# Altium PCB Sitara_Project_Rev_A.PcbDoc (part 4 of 5)
Units mm, origin at the board's own origin, x right, y up, seen from the top; angles counter-clockwise.
Board outline 120 x 85 mm, 8 copper layers (L1 (Sig), L2 (GND), L3 (PWR), L4 (Sig), L5 (GND), L6 (Sig), L7 (GND), L8 (Sig)), stack 1.188 mm thick; 515 components, 404 nets, 2043 pads, 82 vias.
Unrouted connection lines stored in the file: 1274.
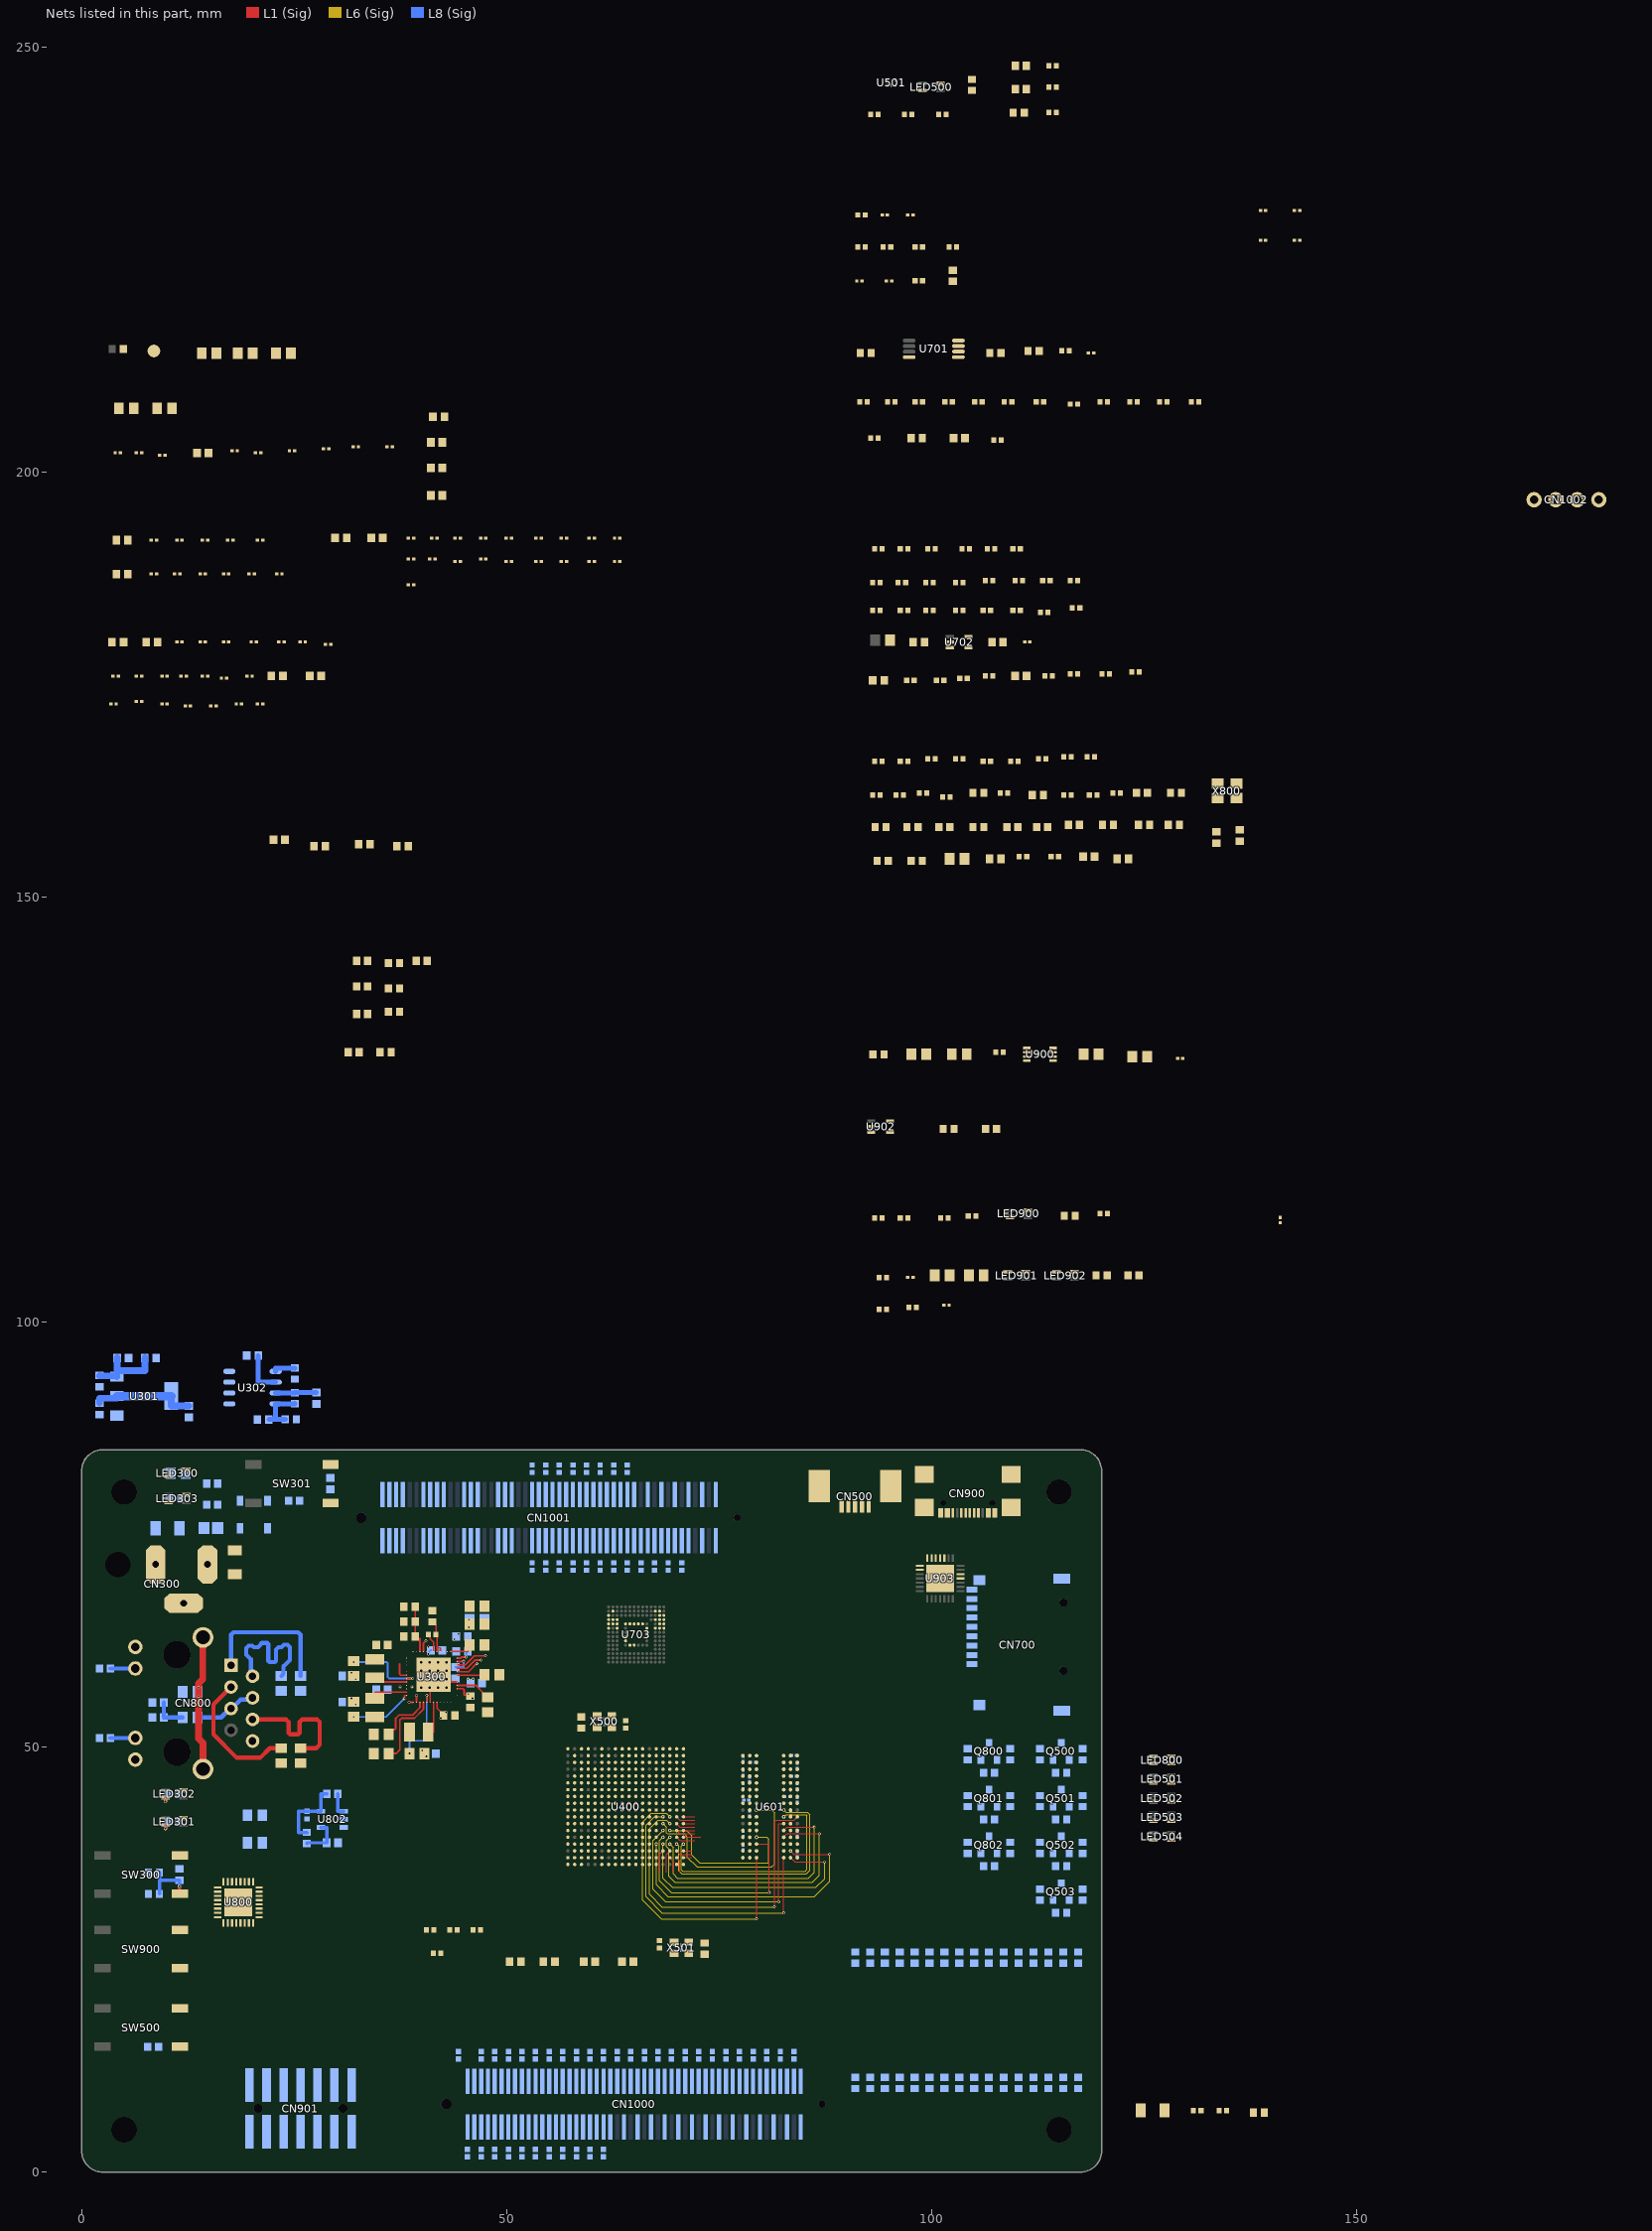
[diagram p5: the nets of this part, all layers, seen from the top]

## Part data
C300: library part CAP_22uF/25V/2012, "Ceramic CAP_22uF/25V/2012", JLCPCB Part Type="Basic Part", LCSC Part #=C45783
C301 C302 C303 C307 C308 C311 C315: library part CAP_100nF/50V/1608, "Ceramic CAP_100nF/50V/1608", JLCPCB Part Type="Basic Part", LCSC Part #=C14663
C304 C313 C316 C317 C318 C319 C320 C321 C322 C323 C324 C325 C328 C329 C414 C420 C427 C428 C448 C449 C464 C465 C701 C800: library part CAP_10uF/25V/1608, "Ceramic CAP_10uF/25V/1608", JLCPCB Part Type="Basic Part", LCSC Part #=C96446
C305 C309 C704 C710: library part CAP_10uF/10V/1608, "Ceramic CAP_10uF/10V/1608", JLCPCB Part Type="Basic Part", LCSC Part #=C19702
C306 C310 C326 C327 C709: library part CAP_2.2uF/16V/1608, "Ceramic CAP_2.2uF/16V/1608", JLCPCB Part Type="Basic Part", LCSC Part #=C23630
C312 C804: library part CAP_470pF/50V/1608, "Ceramic CAP_470pF/50V/1608", JLCPCB Part Type="Basic Part", LCSC Part #=C1620
C314 C400 C401 C405 C412 C413 C803: library part CAP_1uF/50V/1608, "Ceramic CAP_1uF/50V/1608", JLCPCB Part Type="Basic Part", LCSC Part #=C15849
C402 C403 C404 C406 C407 C408 C409 C410 C411 C415 C416 C417 C418 C419 C421 C422 C423 C424 C425 C426 C429 C430 C431 C432 C433 C434 C435 C436 C437 C438 C439 C440 C441 C442 C443 C444 C445 C446 C447 C450 C451 C452 C453 C454 C455 C456 C457 C458 C459 C460 C461 C462 C463 C466 C467 C468 C469 C470 C471 C472 C502 C506 C700 C703 C900 C903 C906 C907: library part CAP_100nF/25V/0603, "Ceramic CAP_100nF/25V/0603", JLCPCB Part Type="Extended Part", LCSC Part #=C181047
C500 C503 C504: library part CAP_100nF/50V/1005, "Ceramic CAP_100nF/50V/1005", JLCPCB Part Type="Basic Part", LCSC Part #=C307331
C501 C902 C904: library part CAP_4.7uF/10V/1005, "10V 4.7uF X5R ±20% 0402  Multilayer Ceramic Capacitors MLCC - SMD/SMT ROHS", JLCPCB Part Type="Basic Part", LCSC Part #=C23733
C505 C602: library part CAP_1nF/50V/1005, "Ceramic CAP_1nF/50V/1005", JLCPCB Part Type="Basic Part", LCSC Part #=C1523
C600 C601 C603 C604 C605 C606 C607 C608 C609 C610 C611 C612 C613 C614 C615 C616 C617 C618 C619 C620 C621 C622 C623 C624 C625 C626: library part CAP_47nF/16V/0603, "16V 47nF X5R ±10% 0201 Multilayer Ceramic Capacitors MLCC - SMD/SMT ROHS", JLCPCB Part Type="Extended Part", LCSC Part #=C88917
C702 C705 C706 C707 C708 C711 C712 C713 C714 C801 C802 C808 C901: library part CAP_100nF/16V/1005, "Ceramic CAP_100nF/16V/1005", JLCPCB Part Type="Basic Part", LCSC Part #=C1525
C805 C806: library part CAP_18pF/50V/1608, "Ceramic CAP_18pF/50V/1608", JLCPCB Part Type="Basic Part", LCSC Part #=C1647
C807: library part CAP_4.7uF/16V/1608, "Ceramic CAP_4.7uF/16V/1608", JLCPCB Part Type="Basic Part", LCSC Part #=C19666
C809 C810 C811 C812: library part CAP_10pF/50V/1608, "Ceramic CAP_10pF/50V/1608", JLCPCB Part Type="Basic Part", LCSC Part #=C1634
C813 C814: library part CAP_10nF/50V/1608, "Ceramic CAP_10nF/50V/1608", JLCPCB Part Type="Basic Part", LCSC Part #=C57112
C905: library part CAP_1uF/25V/1005, "Ceramic CAP_1uF/25V/1005", JLCPCB Part Type="Basic Part", LCSC Part #=C52923
CN300: library part CON_DC-Jack, ComponentLink1Description="Manufacturer Link", ComponentLink1URL=http://www.cliffuk.co.uk/
CN500: library part CON_USB2.0-Mini-B, "USB - mini B USB 2.0 Receptacle Connector 5 Position Surface Mount, Right Angle", JLCPCB Part Type="Extended Part", LCSC Part #=C2692070
CN700: library part CON_MICRO-SD_Socket_TF-01A, "Card Slot MicroSD card (TF card) Self-bouncing SMD SD Card / Memory Card Connector ROHS", JLCPCB Part Type="Extended Part", LCSC Part #=C91145
CN800: library part CON_RJ45_HR911105A, "RJ45Receptacle 1 WithLED Plugin Ethernet Connectors / Modular Connectors (RJ45 RJ11) ROHS", JLCPCB Part Type="Extended Part", LCSC Part #=C12074
CN900: library part CON_USB-Type-C, "USB 2.0 5A 1 Surface Mount 16 Female -35℃~+75℃ Type-C SMD  USB Connectors ROHS", JLCPCB Part Type="Extended Part", LCSC Part #=C2977718
CN901: library part CON_NC_BOX_HEADER_DUAL_2x7PIN(2.00MM)_1, "CONN HEADER SMD 14POS 2MM"
CN1000 CN1001: library part CON_BergStak-Lite(0.8mm)_MALE-100P(10144517-101802LF), JLCPCB Part Type="Extended Part"
CN1002: library part CON_PIN_HEADER_SINGLE-4PIN(2.54MM), "CON_PIN_HEADER_SINGLE-4PIN(2.54MM)"
D300 D301: library part DIO_B5819W, "40V 600mV@1A 1A SOD-123  Schottky Barrier Diodes (SBD) ROHS", JLCPCB Part Type="Basic Part", LCSC Part #=C8598
FB400 FB401 FB402 FB800: library part FB_BLM21PG121SN1D, "3A 1 30mΩ 120Ω@100MHz ±25% 0805  Ferrite Beads ROHS", JLCPCB Part Type="Extended Part", LCSC Part #=C79382
H1000 H1001 H1002 H1003: library part HOLE_NTH-3MM, "Non-Through Hole 3mm"
L300 L301 L302: library part IND_LQM2HPN2R2MG0L, "2.2 µH Shielded Multilayer Inductor 1.3 A 100mOhm Max 1008 (2520 Metric)", JLCPCB Part Type="Extended Part", LCSC Part #=C86092
LED300 LED301 LED302 LED303 LED500 LED900: library part LED_MHT170RGBCT(GREEN), "Colorless transparence -30℃~+85℃ Positive post Common anode RGB 120° 0805  Light Emitting Diodes (LED) ROHS", JLCPCB Part Type="Extended Part", LCSC Part #=C2962094
LED501 LED502 LED503 LED504 LED901 LED902: library part LED_MHT170RGBCT(BLUE), "Colorless transparence -30℃~+85℃ Positive post Common anode RGB 120° 0805  Light Emitting Diodes (LED) ROHS", JLCPCB Part Type="Extended Part", LCSC Part #=C2962094
LED800: library part LED_RGB_MHT170RGBCT, "Colorless transparence -30℃~+85℃ Positive post Common anode RGB 120° 0805  Light Emitting Diodes (LED) ROHS", JLCPCB Part Type="Extended Part", LCSC Part #=C2962094
Q500 Q501 Q502 Q503 Q800 Q801 Q802: library part FET_2N7002, "60V 115mA 200mW 7.5Ω@10V,500mA N Channel SOT-23  MOSFETs ROHS", JLCPCB Part Type="Basic Part", LCSC Part #=C8545
R300 R309 R500: library part RES_0R/3216/0.25W, "RES_0R/3216/0.25W", JLCPCB Part Type="Basic Part", LCSC Part #=C17888, Power Rating=0.1W, Precision=1%, Size=1608
R301 R304 R305 R503 R512 R513 R514 R515 R523 R525 R526 R527 R528 R529 R530 R531 R532 R537 R538: library part RES_100K/1608/0.1W, "RES_100K/1608/0.1W", JLCPCB Part Type="Basic Part", LCSC Part #=C25803, Power Rating=0.1W, Precision=1%, Size=1608
R302 R303: library part RES_NC_10K/1608/0.1W, "RES_10K/1608/0.1W", Power Rating=0.1W, Precision=1%, Size=1608
R306: library part RES_680R/2012/0.125W, "RES_680R/2012/0.125W", JLCPCB Part Type="Basic Part", LCSC Part #=C17798, Power Rating=0.125W, Precision=1%, Size=2012
R307 R327 R328: library part RES_4.7K/1608/0.1W, "RES_4.7K/1608/0.1W", JLCPCB Part Type="Basic Part", LCSC Part #=C23162, Power Rating=0.1W, Precision=1%, Size=1608
R308 R540 R551 R723 R817 R818 R1000 R1001 R1002 R1003 R1004 R1005 R1006 R1007 R1008 R1009 R1010 R1011 R1012 R1013 R1014 R1015 R1016 R1017 R1018 R1019 R1020 R1021 R1022 R1023 R1024 R1025 R1026 R1027 R1028 R1029 R1030 R1031 R1032 R1033 R1034 R1035 R1036 R1037 R1038 R1039 R1040 R1041 R1042 R1043 R1044 R1045 R1046 R1047 R1048 R1049 R1050 R1051 R1052 R1053 R1054 R1055: library part RES_0R/1005/62.5mW, "RES_0R/1005/62.5mW", JLCPCB Part Type="Basic Part", LCSC Part #=C17168, Power Rating=62.5mW, Precision=1%, Size=1005
R310 R311 R312 R313 R314 R315 R316 R317 R319 R336 R400 R401 R741 R834 R840 R841 R842 R843 R844 R900 R903 R914 R915: library part RES_0R/2012/0.125W, "RES_0R/2012/0.125W", JLCPCB Part Type="Basic Part", LCSC Part #=C17477, Power Rating=0.125W, Precision=1%, Size=2012
R318 R331 R334: library part RES_510R/1608/0.1W, "RES_510R/1608/0.1W", JLCPCB Part Type="Basic Part", LCSC Part #=C23193, Power Rating=0.1W, Precision=1%, Size=1608
R320 R321: library part RES_1.5K/2012/0.125W, "RES_1.5K/2012/0.125W", JLCPCB Part Type="Basic Part", LCSC Part #=C4310, Power Rating=0.125W, Precision=1%, Size=2012
R322 R323 R324 R325 R329 R330 R332 R335 R522 R542 R543 R545 R553 R711 R717 R722 R820 R821 R911 R916: library part RES_0R/1608/0.1W, "RES_0R/1608/0.1W", JLCPCB Part Type="Basic Part", LCSC Part #=C21189, Power Rating=0.1W, Precision=1%, Size=1608
R326: library part RES_200K/1608/0.1W, "RES_200K/1608/0.1W", JLCPCB Part Type="Basic Part", LCSC Part #=C25811, Power Rating=0.1W, Precision=1%, Size=1608
R333: library part RES_330K/1608/0.1W, "RES_330K/1608/0.1W", JLCPCB Part Type="Basic Part", LCSC Part #=C23137, Power Rating=0.1W, Precision=1%, Size=1608
R337 R901 R902: library part RES_NC_0R/2012/0.125W, "0R/2012/0.125W/NC", Power Rating=0.1W, Precision=1%, Size=1608
R402 R813 R815: library part RES_NC_0R/1608/0.1W, "0R/1608/0.1W/NC", Power Rating=0.1W, Precision=1%, Size=1608
R501 R907: library part RES_1M/1005/62.5mW, "RES_1M/1005/62.5mW", JLCPCB Part Type="Basic Part", LCSC Part #=C26083, Power Rating=62.5mW, Precision=1%, Size=1005
R502 R504 R505 R506 R507 R508 R509 R510 R511 R516 R517 R524 R533 R534 R535 R536: library part RES_NC_100K/1608/0.1W, "RES_100K/1608/0.1W", Power Rating=0.1W, Precision=1%, Size=1608
R518 R823: library part RES_100R/1608/0.1W, "RES_100R/1608/0.1W", JLCPCB Part Type="Basic Part", LCSC Part #=C22775, Power Rating=0.1W, Precision=1%, Size=1608
R519 R520 R702 R910: library part RES_4.7K/1005/62.5mW, "RES_4.7K/1005/62.5mW", JLCPCB Part Type="Basic Part", LCSC Part #=C25900, Power Rating=62.5mW, Precision=1%, Size=1005
R521 R908: library part RES_1K/1608/0.1W, "RES_1K/1608/0.1W", JLCPCB Part Type="Basic Part", LCSC Part #=C21190, Power Rating=0.1W, Precision=1%, Size=1608
R539 R819 R824 R829 R830 R831 R832 R833 R835 R909: library part RES_10K/1608/0.1W, "RES_10K/1608/0.1W", JLCPCB Part Type="Basic Part", LCSC Part #=C25804, Power Rating=0.1W, Precision=1%, Size=1608
R541 R547 R550 R555 R845 R846 R847 R850 R853: library part RES_470R/1608/0.1W, "RES_470R/1608/0.1W", JLCPCB Part Type="Basic Part", LCSC Part #=C23179, Power Rating=0.1W, Precision=1%, Size=1608
R544 R548 R552 R556 R822 R848 R851 R854: library part RES_12K/1608/0.1W, "RES_12K/1608/0.1W", JLCPCB Part Type="Basic Part", LCSC Part #=C22790, Power Rating=0.1W, Precision=1%, Size=1608
R546 R549 R554 R557 R849 R852 R855: library part RES_22R/1608/0.1W, "RES_22R/1608/0.1W", JLCPCB Part Type="Basic Part", LCSC Part #=C23345, Power Rating=0.1W, Precision=1%, Size=1608
R600: library part RES_1.5K/1005/62.5mW, "RES_1.5K/1005/62.5mW", JLCPCB Part Type="Basic Part", LCSC Part #=C25867, Power Rating=62.5mW, Precision=1%, Size=1005
R601 R602 R603 R703 R704 R705 R706 R707 R708 R709 R719 R720 R721 R724 R725 R726 R727 R728 R729 R730 R731: library part RES_10K/1005/62.5mW, "RES_10K/1005/62.5mW", JLCPCB Part Type="Basic Part", LCSC Part #=C25744, Power Rating=62.5mW, Precision=1%, Size=1005
R604: library part RES_240R/1608/0.1W, "RES_240R/1608/0.1W", JLCPCB Part Type="Basic Part", LCSC Part #=C23350, Power Rating=0.1W, Precision=1%, Size=1608
R605 R836 R837 R838 R839: library part RES_49.9R/1005/62.5mW, "RES_49.9R/1005/62.5mW", JLCPCB Part Type="Basic Part", LCSC Part #=C25120, Power Rating=62.5mW, Precision=1%, Size=1005
R700 R701: library part RES_NC_4.7K/1608/0.1W, "RES_4.7K/1608/0.1W", Power Rating=0.1W, Precision=1%, Size=1608
R710 R712 R713 R714 R715 R716 R718 R732 R733 R734 R735 R736 R737 R738 R739 R740 R801 R802 R803 R804 R805: library part RES_22R/1005/62.5mW, "RES_22R/1005/62.5mW", JLCPCB Part Type="Basic Part", LCSC Part #=C25092, Power Rating=62.5mW, Precision=1%, Size=1005
R800 R806 R807 R808 R809 R810 R811 R812 R814 R816: library part RES_100R/1005/62.5mW, "RES_100R/1005/62.5mW", JLCPCB Part Type="Basic Part", LCSC Part #=C25076, Power Rating=62.5mW, Precision=1%, Size=1005
R825 R826 R827 R828: library part RES_1.5K/1608/0.1W, "RES_1.5K/1608/0.1W", JLCPCB Part Type="Basic Part", LCSC Part #=C22843, Power Rating=0.1W, Precision=1%, Size=1608
R904: library part RES_100K/1005/62.5mW, "RES_100K/1005/62.5mW", JLCPCB Part Type="Basic Part", LCSC Part #=C25741, Power Rating=62.5mW, Precision=1%, Size=1005
R905 R906: library part RES_5.1K/1005/62.5mW, "RES_5.1K/1005/62.5mW", JLCPCB Part Type="Basic Part", LCSC Part #=C25905, Power Rating=62.5mW, Precision=1%, Size=1005
R912 R913: library part RES_680R/1608/0.1W, "RES_680R/1608/0.1W", JLCPCB Part Type="Basic Part", LCSC Part #=C23228, Power Rating=0.1W, Precision=1%, Size=1608
SW300 SW301 SW500 SW900: library part SW_K2-1102SP-C4SC-04(2P), "-25℃~+85℃ 6mm 5mm Round Button 50mA Brick nogging 6mm SPST 100MΩ 100000 250gf@±30gf 12V SMD  Tactile Switches ROHS", JLCPCB Part Type="Extended Part", LCSC Part #=C127509
U300: library part IC_PMIC_TPS65217CRSLR, "Battery Management, Display (LED Drivers), Handheld/Mobile Devices, Power Supply PMIC 48-VQFN (6x6)", JLCPCB Part Type="Extended Part", LCSC Part #=C116081
U301: library part IC_REG_AMS1117-3.3, "72dB@(120Hz) 1A 1.3V@(800mA) Fixed 3.3V~3.3V Positive 1 SOT-223  Linear Voltage Regulators (LDO) ROHS", JLCPCB Part Type="Basic Part", LCSC Part #=C6186
U302: library part IC_REG_MIC5209YM-TR, "Linear Voltage Regulator IC Positive Adjustable 1 Output 500mA 8-SOIC", JLCPCB Part Type="Extended Part", LCSC Part #=C461593
U400: library part IC_SOC_AM3358BZCZ100, "ARM® Cortex®-A8 Microprocessor IC Sitara™ 1 Core, 32-Bit 1.0GHz 324-NFBGA (15x15)", JLCPCB Part Type="Extended Part", LCSC Part #=C73932
U501: library part DIO_TVS_TPD4S012DRYR, "Clamp 3A (8/20µs) Ipp Tvs Diode Surface Mount 6-SON (1.45x1)", JLCPCB Part Type="Extended Part", LCSC Part #=C96506
U601: library part IC_MEM_DDR3L_D2516ECMDXGJD-U, "DRAM 4Gb 96 ball FBGA DDR3L 1866", JLCPCB Part Type="Extended Part", LCSC Part #=C2927180
U701: library part IC_EEPROM_AT24C16, "IC EEPROM 16KBIT I2C 1MHZ 8TSSOP", JLCPCB Part Type="Extended Part", LCSC Part #=C112954
U702: library part IC_BUF_SN74LVC1G06DCKR, "Inverter IC 1 Channel Open Drain SC-70-5", JLCPCB Part Type="Extended Part", LCSC Part #=C7828
U703: library part IC_eMMC_MTFC32GAZAQHD-WT, "FLASH - NAND Memory IC 256Gbit MMC 200 MHz 153-VFBGA (11.5x13)", JLCPCB Part Type="Extended Part", LCSC Part #=C5330430
U800: library part IC_ETH_LAN8710A-EZC-TR, "4/4 Transceiver Full MII, RMII 32-QFN (5x5)", JLCPCB Part Type="Extended Part", LCSC Part #=C46185
U802: library part IC_AND_SN74AHC1G09DBVR, "AND Gate IC 1 Channel Open Drain SOT-23-5", JLCPCB Part Type="Extended Part", LCSC Part #=C840099
U900: library part IC_BUF_SN74LVC2G241DCUR, "Buffer, Non-Inverting 2 Element 1 Bit per Element 3-State Output 8-VSSOP", JLCPCB Part Type="Extended Part", LCSC Part #=C10430
U902: library part IC_BUF_SN74LVC1G07DCKR, "Buffer, Non-Inverting 1 Element 1 Bit per Element Open Drain Output SC-70-5", JLCPCB Part Type="Extended Part", LCSC Part #=C7830
U903: library part IC_USB_CP2102, "Transceiver 1Mbps USB 1/1 QFN-28_5x5x05P  USB ICs ROHS", JLCPCB Part Type="Basic Part", LCSC Part #=C6568
X500: library part OSC_SX2M24.000M20F30TNN(24MHz), "1.62V~3.63V ±20ppm 10mA ±30ppm CMOS 24MHz SMD2520-4P  Crystal Oscillators ROHS", JLCPCB Part Type="Extended Part", LCSC Part #=C2901600
X501: library part OSC_SX2M32.768KM20F30TNN(32.768kHz), "1.62V~3.63V ±20ppm 90uA ±30ppm CMOS 32.768kHz SMD2520-4P  Crystal Oscillators ROHS", JLCPCB Part Type="Extended Part", LCSC Part #=C2901603
X800: library part XTAL_25MHz_X322525MOB4SI, "25MHz Surface Mount Crystal 12pF ±10ppm ±20ppm SMD3225-4P Crystals ROHS", JLCPCB Part Type="Basic Part", LCSC Part #=C9006

## Via types
v1: diameter 0.35, hole 0.2, L1 (Sig) to L8 (Sig), tented both sides, 66 vias
v2: diameter 0.45/0.45/0.45/0.45/0.45/0.45/0.45/0.45 (per signal layer), hole 0.3, L1 (Sig) to L8 (Sig), tented both sides, 16 vias

## Nets (pads, with @x,y where several pads share a name; then routed paths per layer and width w, separated by ;. In a path a pad name is that pad's centre, name@x,y a point inside that pad or via, vN(x,y) a via of type N, cw(c..) or ccw(c..) an arc to the next point about the centre after c; other vN are vias at no path point)
AIN0: R1001.2 U400.B6
AIN1: R1003.2 U400.C7
AIN2: R1005.2 U400.B7
AIN3: R1007.2 U400.A7
AIN4: R1009.2 U400.C8
AIN5: R1011.2 U400.B8
AIN6: R1013.2 U400.A8
AM3_EEPROM_WP: R702.1 U400.T16 U701.7
AM3_GPIO0_22: R1027.1 U400.U10
AM3_GPIO0_23: R1030.1 U400.T10
AM3_GPIO0_26: R1033.1 U400.T11
AM3_GPIO0_27: R1036.1 U400.U12
AM3_GPIO1_12: R1039.1 U400.T12
AM3_GPIO1_13: R1042.1 U400.R12
AM3_GPIO1_14: R1045.1 U400.V13
AM3_GPIO1_15: R1048.1 U400.U13
AM3_GPIO_ETH_PHY_RESET: R835.2 U400.E18 U802.1 | length 2.7
  L8 (Sig) w0.4: R835.2@30.15,44.5 30.15,42.45 U802.1@30.85,42.45
AM3_I2C0_SCL: R322.2 R700.1 U400.C16 U701.6
AM3_I2C0_SDA: R323.2 R701.1 U400.C17 U701.5
AM3_I2C1_SCL: R1028.2 U400.A16
AM3_I2C1_SDA: R1031.2 U400.B16
AM3_I2C2_SCL: R1029.1 U400.D17
AM3_I2C2_SDA: R1032.1 U400.D18
AM3_PMIC_LDO_PGOOD: R329.2 U400.B5
AM3_PMIC_nINT: R330.2 U400.B18
AM3_PMIC_nWAKEUP: R332.2 U400.C5
AM3_PMIC_PGOOD: R325.2 U400.B15 U902.2
AM3_PMIC_PWR_EN: R324.2 U400.C6
AM3_SPI1_CS0: R1055.2 U400.C12
AM3_SPI1_D0: R1053.2 U400.B13
AM3_SPI1_D1: R1054.2 U400.D12
AM3_SPI1_SCLK: R1051.2 U400.A13
AM3_STATUS_LED_B: R855.1 R1041.1 U400.R5
AM3_STATUS_LED_G: R852.1 R1038.1 U400.U5
AM3_STATUS_LED_R: R849.1 R1035.1 U400.V5
AM3_UART0_RX: R901.2 R912.1 R914.2 U400.E15
AM3_UART0_TX: R902.1 R913.1 R915.2 U400.E16
AM3_UART1_RX: R1037.2 U400.D16
AM3_UART1_TX: R1034.2 U400.D15
AM3_UART2_RX: R1043.2 U400.A17
AM3_UART2_TX: R1040.2 U400.B17
AM3_UART4_RX: R1049.2 U400.T17
AM3_UART4_TX: R1046.2 U400.U17
AM3_USER_LED1: R546.1 R1044.1 U400.V15
AM3_USER_LED2: R549.1 R1047.1 U400.U15
AM3_USER_LED3: R554.1 R1050.1 U400.T15
AM3_USER_LED4: R557.1 R1052.1 U400.V16
AM3_WARM_nRESET: R911.2 U400.A10 U802.2 U902.4
CAP_VBB_MPU: C401.1 U400.C10
CAP_VDD_RTC: C400.1 U400.D6
CAP_VDD_SRAM_CORE: C413.1 U400.D9
CAP_VDD_SRAM_MPU: C412.1 U400.D11
CP2102_RST: R910.2 U903.9
CP2102_RXD: R915.1 U903.25
CP2102_RXD_LED: LED902.3 R913.2
CP2102_TXD: R914.1 U903.26
CP2102_TXD_LED: LED901.3 R912.2
DDR_A0: U400.F3 U601.N3 | length 18.8
  L6 (Sig) w0.1: v1(69.2,40.2) 71.2,40.2 71.8,39.6 71.8,37.3 72.7,36.4 80.741,36.4 80.8,36.459 80.8,39.2 80.6,39.4 v1(79.4,39.4)
DDR_A1: U400.H1 U601.P7 | length 1.3
  L1 (Sig) w0.1: U400.H1@70.8,41.8 72.1,41.8
DDR_A2: U400.E4 U601.P3 | length 25.9
  L1 (Sig) w0.1: U601.P3@79.4,38.6 80.8,38.6 80.9,38.5 v1(80.9,32.9)
  L6 (Sig) w0.1: v1(68.4,39.4) 68,39 68,34.3 69.4,32.9 v1(80.9,32.9)
DDR_A3: U400.C3 U601.N2 | length 2.7
  L1 (Sig) w0.1: 68.8,35.3 68.8,37.4 U400.C3@69.2,37.8
DDR_A4: U400.C2 U601.P8 | length 2
  L1 (Sig) w0.1: U400.C2@70,37.8 70.4,37.4 71.8,37.4
DDR_A5: U400.B1 U601.P2 | length 1
  L1 (Sig) w0.1: U400.B1@70.8,37 71.8,37
DDR_A6: U400.D5 U601.R8 | length 34.5
  L1 (Sig) w0.1: v1(83.4,37.8) 83.8,37.4 v1(88,37.4)
  L6 (Sig) w0.1: v1(67.6,38.6) 67.6,33.8 69,32.4 86.2,32.4 88,34.2 v1(88,37.4)
DDR_A7: U400.E2 U601.R2 | length 2.3
  L1 (Sig) w0.1: U400.E2@70,39.4 70.4,39 72.1,39
DDR_A8: U400.D4 U601.T8 | length 30.1
  L1 (Sig) w0.1: U601.T8@83.4,37 83.9,36.5 v1(87.4,36.5)
  L6 (Sig) w0.1: v1(68.4,38.6) 68.4,34.6 69.5,33.5 86.4,33.5 87.4,34.5 v1(87.4,36.5)
DDR_A9: U400.C1 U601.R3 | length 1
  L1 (Sig) w0.1: U400.C1@70.8,37.8 71.8,37.8
DDR_A10: U400.F4 U601.L7 | length 32.6
  L1 (Sig) w0.1: v1(82,31.8) 82,40.941 82.059,41 U601.L7@82.6,41
  L6 (Sig) w0.1: v1(68.4,40.2) 67.2,39 67.2,33.3 68.7,31.8 v1(82,31.8)
DDR_A11: U400.F2 U601.R7 | length 2.3
  L1 (Sig) w0.1: U400.F2@70,40.2 70.4,39.8 72.1,39.8
DDR_A12: U400.E3 U601.N7 | length 32.5
  L1 (Sig) w0.1: U601.N7@82.6,39.4 83,39.8 v1(86.8,39.8)
  L6 (Sig) w0.1: v1(69.2,39.4) 68.8,39 68.8,38.3 69.1,38 69.1,34.8 69.8,34.1 85.958,34.1 86.8,34.942 v1(86.8,39.8)
DDR_A13: U400.H3 U601.T3 | length 34.5
  L1 (Sig) w0.1: v1(79.4,29.8) U601.T3@79.4,37
  L6 (Sig) w0.1: v1(69.2,41.8) 68.8,42.2 67,42.2 66,41.2 66,32 68.2,29.8 v1(79.4,29.8)
DDR_A14: U400.H4 U601.T7 | length 34.3
  L1 (Sig) w0.1: v1(82.6,30.5) U601.T7@82.6,37
  L6 (Sig) w0.1: v1(68.4,41.8) 67.4,41.8 66.4,40.8 66.4,32.4 68.3,30.5 v1(82.6,30.5)
DDR_A15: U400.D3 U601.M7 | length 29.8
  L1 (Sig) w0.1: U601.M7@82.6,40.2 83,40.6 v1(86.2,40.6)
  L6 (Sig) w0.1: v1(69.2,38.6) 69.6,38.2 69.6,35.1 70.1,34.6 85.5,34.6 86.2,35.3 v1(86.2,40.6)
DDR_BA0: U400.C4 U601.M2 | length 2.7
  L1 (Sig) w0.1: 68,35.3 68,37.4 U400.C4@68.4,37.8
DDR_BA1: U400.E1 U601.N8 | length 2
  L1 (Sig) w0.1: U400.E1@70.8,39.4 72.8,39.4
DDR_BA2: U400.B3 U601.M3 | length 1.8
  L1 (Sig) w0.1: U400.B3@69.2,37 69.578,36.622 69.578,35.322
DDR_CK_N: U400.D1 U601.K7 | length 27.3
  L6 (Sig) w0.1: v1(70.8,38.6) 70.55,38.35 70.55,35.575 70.725,35.4 85.125,35.4 85.35,35.625 85.35,41.95 85.25,42.05 82.85,42.05 v1(82.6,41.8)
DDR_CK_P: U400.D2 U601.J7 | length 28.8
  L6 (Sig) w0.1: v1(70,38.6) 70.25,38.35 70.25,35.451 70.601,35.1 85.249,35.1 85.65,35.501 85.65,42.074 85.374,42.35 82.85,42.35 v1(82.6,42.6)
DDR_CKE: R601.1 U400.G3 U601.K9 | length 39
  L1 (Sig) w0.1: v1(81.5,31.2) 81.5,41.3 81.6,41.4 83.8,41.4 U601.K9@84.2,41.8
  L6 (Sig) w0.1: v1(69.2,41) 68.8,41.4 67.8,41.4 66.8,40.4 66.8,32.7 68.3,31.2 v1(81.5,31.2)
DDR_DQ0: U400.M3 U601.E3
DDR_DQ1: U400.M4 U601.F7
DDR_DQ2: U400.N1 U601.F2
DDR_DQ3: U400.N2 U601.F8
DDR_DQ4: U400.N3 U601.H3
DDR_DQ5: U400.N4 U601.H8
DDR_DQ6: U400.P3 U601.G2
DDR_DQ7: U400.P4 U601.H7
DDR_DQ8: U400.J1 U601.D7
DDR_DQ9: U400.K1 U601.C3
DDR_DQ10: U400.K2 U601.C8
DDR_DQ11: U400.K3 U601.C2
DDR_DQ12: U400.K4 U601.A7
DDR_DQ13: U400.L3 U601.A2
DDR_DQ14: U400.L4 U601.B8
DDR_DQ15: U400.M1 U601.A3
DDR_DQM0: U400.M2 U601.E7
DDR_DQM1: U400.J2 U601.D3
DDR_DQS0_N: U400.P2 U601.G3
DDR_DQS0_P: U400.P1 U601.F3
DDR_DQS1_N: U400.L2 U601.B7
DDR_DQS1_P: U400.L1 U601.C7
DDR_NCAS: U400.F1 U601.K3 | length 1.3
  L1 (Sig) w0.1: U400.F1@70.8,40.2 72.1,40.2
DDR_NCS: U400.H2 U601.L2 | length 2.3
  L1 (Sig) w0.1: U400.H2@70,41.8 70.4,41.4 72.1,41.4
DDR_NRAS: U400.G4 U601.J3 | length 25.5
  L6 (Sig) w0.1: v1(68.4,41) 68.8,40.6 68.8,39.9 68.9,39.8 70.9,39.8 71.271,39.429 71.271,37.029 72.4,35.9 81.2,35.9 81.5,36.2 81.5,42.3 81.2,42.6 v1(79.4,42.6)
DDR_NRST: R600.1 U400.G2 U601.T2 | length 2.3
  L1 (Sig) w0.1: U400.G2@70,41 70.4,40.6 72.1,40.6
DDR_NWE: U400.B2 U601.L3 | length 1.9
  L1 (Sig) w0.1: U400.B2@70,37 70.4,36.6 70.4,35.3
DDR_ODT: U400.G1 U601.K1 | length 1.3
  L1 (Sig) w0.1: U400.G1@70.8,41 72.1,41
DDR_VREF: C600.2 C601.2 C602.2 C625.2 C626.2 R602.2 R603.2 U400.J4 U601.H1 U601.M8
DDR_VTP: R605.1 U400.J3
DGND: C300.1 C301.1 C302.1 C303.1 C304.1 C305.1 C306.1 C307.1 C308.1 C309.1 C310.1 C311.1 C312.1 C316.1 C317.1 C318.1 C319.1 C320.1 C321.1 C322.1 C323.1 C324.1 C325.1 C326.1 C327.1 C328.1 C329.1 C400.2 C401.2 C402.1 C403.1 C404.1 C405.1 C406.1 C407.1 C408.1 C409.1 C410.1 C411.1 C412.2 C413.2 C414.1 C415.1 C416.1 C417.1 C418.1 C419.1 C420.1 C421.1 C422.1 C423.1 C424.1 C425.1 C426.1 C427.1 C428.1 C429.1 C430.1 C431.1 C432.1 C433.1 C434.1 C435.1 C436.1 C437.1 C438.1 C439.1 C440.1 C441.1 C442.1 C443.1 C444.1 C445.1 C446.1 C447.1 C448.1 C449.1 C450.1 C451.1 C452.1 C453.1 C454.1 C455.1 C456.1 C457.1 C458.1 C459.1 C460.1 C461.1 C462.1 C463.1 C464.1 C465.1 C466.1 C467.1 C468.1 C469.1 C470.1 C471.1 C472.1 C500.2 C501.1 C600.1 C601.1 C602.1 C603.1 C604.1 C605.1 C606.1 C607.1 C608.1 C609.1 C610.1 C611.1 C612.1 C613.1 C614.1 C615.1 C616.1 C617.1 C618.1 C619.1 C620.1 C621.1 C622.1 C623.1 C624.1 C625.1 C626.1 C700.2 C701.2 C702.1 C703.1 C704.1 C705.1 C706.1 C707.1 C708.1 C709.1 C710.1 C711.1 C712.1 C713.1 C714.1 C800.2 C801.2 C802.2 C803.2 C804.2 C805.1 C806.1 C807.1 C808.2 C809.1 C810.1 C811.1 C812.1 C813.2 C814.2 C900.1 C901.1 C902.1 C903.2 C904.1 C905.2 C906.1 C907.1 CN500.5 CN700.6 CN700.10 CN700.11 CN700.12 CN700.13 CN800.8 CN900.A1 CN900.B1 CN901.6 CN901.8 CN901.10 CN901.12 CN901.14 CN1000.3 CN1000.4 CN1000.7 CN1000.8 CN1000.11 CN1000.12 CN1000.15 CN1000.16 CN1000.19 CN1000.20 CN1000.23 CN1000.24 CN1000.27 CN1000.28 CN1000.31 CN1000.32 CN1000.35 CN1000.36 CN1000.39 CN1000.40 CN1000.43 CN1000.44 CN1000.47 CN1000.48 CN1000.51 CN1000.52 CN1000.55 CN1000.56 CN1000.59 CN1000.60 CN1000.63 CN1000.64 CN1000.67 CN1000.68 CN1000.71 CN1000.72 CN1000.75 CN1000.76 CN1000.79 CN1000.80 CN1000.83 CN1000.84 CN1000.87 CN1000.88 CN1000.91 CN1000.92 CN1000.95 CN1000.96 CN1000.99 CN1000.100 CN1001.13 CN1001.14 CN1001.15 CN1001.16 CN1001.17 CN1001.18 CN1001.19 CN1001.20 CN1001.47 CN1001.48 CN1001.51 CN1001.52 CN1001.55 CN1001.56 CN1001.59 CN1001.60 CN1001.63 CN1001.64 CN1001.67 CN1001.68 CN1001.71 CN1001.72 CN1001.75 CN1001.76 CN1001.79 CN1001.80 CN1001.83 CN1001.84 CN1001.87 CN1001.88 CN1001.91 CN1001.92 CN1001.95 CN1001.96 CN1001.99 CN1001.100 CN1002.4 FB400.1 LED303.2 Q500.2 Q501.2 Q502.2 Q503.2 Q800.2 Q801.2 Q802.2 R301.1 R305.1 R306.2 R307.2 R309.2 R318.1 R331.1 R333.1 R400.2 R401.1 R501.1 R520.1 R521.2 R522.1 R523.1 R524.1 R525.1 R526.1 R527.1 R528.1 R529.1 R530.1 R531.1 R532.1 R533.1 R534.1 R535.1 R536.1 R537.1 R538.1 R539.2 R544.1 R548.1 R552.1 R556.1 R601.2 R603.1 R604.1 R605.2 R819.1 R823.1 R824.1 R829.1 R830.1 R831.1 R832.1 R844.2 R845.1 R846.1 R848.1 R851.1 R854.1 R904.1 R905.1 R906.1 R907.2 R908.2 SW300.3 SW301.3 SW500.3 SW900.3 U300.30 U300.41 U300.49 U301.1 U302.5 U302.6 U302.7 U302.8 U400.A1 U400.A18 U400.F8 U400.G8 U400.G9 U400.G11 U400.G12 U400.H6 U400.H7 U400.H8 U400.H9 U400.H10 U400.H12 U400.J6 U400.J7 U400.J8 U400.J9 U400.J10 U400.J11 U400.K7 U400.K9 U400.K10 U400.K11 U400.L10 U400.L11 U400.L12 U400.L13 U400.M6 U400.M7 U400.M8 U400.M9 U400.M10 U400.M12 U400.M14 U400.N7 U400.N10 U400.N11 U400.N14 U400.V1 U400.V18 U501.4 U601.A9 U601.B1 U601.B3 U601.B9 U601.D1 U601.D8 U601.E1 U601.E2 U601.E8 U601.F9 U601.G1 U601.G8 U601.G9 U601.J2 U601.J8 U601.M1 U601.M9 U601.P1 U601.P9 U601.T1 U601.T9 U701.4 U702.3 U703.A6 U703.C4 U703.E7 U703.G5 U703.H10 U703.J5 U703.K8 U703.N2 U703.N5 U703.P4 U703.P6 U800.33 U802.3 U900.1 U900.4 U902.3 U903.3 U903.29 X800.2 X800.4 | length 3.1
  L1 (Sig) w0.2: v2(40.925,57) 41.002,56.923 41.002,55.933 41,55.931 U300.30@41,55.3 ; v2(42.925,58) 43.251,57.675 U300.41@44.175,57.675
  other v2: 39.925,57 41.925,57 42.925,57 39.925,58 40.925,58 41.925,58 39.925,59 40.925,59 41.925,59 42.925,59 39.925,60 40.925,60 41.925,60 42.925,60
DP1.1V_CORE: C325.2 C448.2 C449.2 C450.2 C451.2 C452.2 C453.2 C454.2 C455.2 C456.2 C457.2 C458.2 C459.2 C460.2 C461.2 C462.2 C463.2 R312.2 U400.F6 U400.F7 U400.G6 U400.G7 U400.G10 U400.H11 U400.J12 U400.K6 U400.K8 U400.K12 U400.L6 U400.L7 U400.L8 U400.L9 U400.M11 U400.M13 U400.N8 U400.N9 U400.N12 U400.N13
  other v1: 40.55,48.9 40.05,49.6
DP1.1V_MPU: C324.2 C414.2 C415.2 C416.2 C417.2 C418.2 C419.2 R311.2 U400.F10 U400.F11 U400.F12 U400.F13 U400.G13 U400.H13 U400.J13
  other v1: 32.25,55 31.75,55.75
DP1.5V_DDR: C323.2 C464.2 C465.2 C466.2 C467.2 C468.2 C469.2 C470.2 C471.2 C472.2 C603.2 C604.2 C605.2 C606.2 C607.2 C608.2 C609.2 C610.2 C611.2 C612.2 C613.2 C614.2 C615.2 C616.2 C617.2 C618.2 C619.2 C620.2 C621.2 C622.2 C623.2 C624.2 R310.2 R600.2 R602.1 U400.E5 U400.F5 U400.G5 U400.H5 U400.J5 U400.K5 U400.L5 U601.A1 U601.A8 U601.B2 U601.C1 U601.C9 U601.D2 U601.D9 U601.E9 U601.F1 U601.G7 U601.H2 U601.H9 U601.K2 U601.K8 U601.N1 U601.N9 U601.R1 U601.R9
  other v1: 32.25,58 31.75,58.75
DP1.8V_VDDS: C420.2 C421.2 C422.2 C423.2 C424.2 C425.2 C426.2 R315.2 U400.E6 U400.E14 U400.F9 U400.K13 U400.N6 U400.P9 U400.P14
DP1.8V_VIO: R313.2 U300.18 U902.5 | length 2.1
  L1 (Sig) w0.2: 37.4,59.8 37.4,58.6 37.525,58.475 U300.18@38.225,58.475
DP1.8V_VRTC: C326.2 C411.2 C506.2 R314.2 R327.2 R553.1 U400.D7 X501.4
DP1.8VS: C328.2 C402.2 C403.2 C404.2 C703.2 C710.2 C711.2 C712.2 C713.2 C714.2 FB401.1 FB402.1 R317.2 R719.2 R720.2 R721.2 R724.2 R725.2 R726.2 R727.2 R728.2 R729.2 R730.2 R731.2 U400.D10 U400.E9 U400.N16 U400.R16 U702.5 U703.C6 U703.M4 U703.N4 U703.P3 U703.P5
DP3.3VS_A: C329.2 C408.2 C427.2 C428.2 C429.2 C430.2 C431.2 C432.2 C433.2 C434.2 C435.2 C436.2 C437.2 C438.2 C439.2 C440.2 C441.2 C442.2 C443.2 C444.2 C445.2 C446.2 C447.2 C700.1 LED800.4 R319.2 R320.2 R321.2 R328.2 R335.2 R502.2 R503.2 R504.2 R505.2 R506.2 R507.2 R508.2 R509.2 R510.2 R511.2 R512.2 R513.2 R514.2 R515.2 R516.2 R517.2 R541.2 R547.2 R550.2 R555.2 R700.2 R701.2 R702.2 R909.2 U400.E10 U400.E11 U400.E12 U400.E13 U400.F14 U400.G14 U400.H14 U400.J14 U400.K14 U400.L14 U400.N5 U400.N15 U400.P5 U400.P6 U400.P7 U400.P8 U400.P10 U400.P11 U400.P12 U400.P13 U400.R15 U701.8
DP3.3VS_AMS: C308.2 C309.2 CN1001.25 CN1001.26 CN1001.27 CN1001.28 CN1001.29 CN1001.30 LED301.4 R337.1 U301.2 U301.4 | length 12.5
  L8 (Sig) w0.8: C308.2@2.1,90.475 2.1,91.05 4.15,91.05 U301.2@4.15,91.3 ; U301.4@10.55,91.3 10.55,90.15 C309.2@12.6,90.15
  L8 (Sig) w1: U301.2@4.15,91.3 U301.4@10.55,91.3
DP3.3VS_B: C701.1 C702.2 C704.2 C705.2 C706.2 C707.2 C708.2 C808.1 C900.2 C904.2 C905.1 C906.2 C907.2 CN700.4 CN901.2 CN1002.1 FB800.1 LED901.4 LED902.4 R336.2 R337.2 R519.1 R703.2 R704.2 R705.2 R706.2 R707.2 R708.2 R709.2 R825.2 R826.2 R827.2 R828.2 R833.1 R835.1 R910.1 U703.E6 U703.F5 U703.J10 U703.K9 U800.12 U802.5 U900.7 U900.8 U903.6 U903.7 | length 8.9
  L8 (Sig) w0.4: R833.1@26.5,39.97 25.5,39.97 25.5,42.45 C808.1@26.5,42.45 U802.5@28.15,42.45 28.15,44.5 R835.1@28.85,44.5
DP3.3VS_C: C327.2 R316.2 R334.1
DP3.3VS_MIC: C311.2 CN1001.35 CN1001.36 CN1001.37 CN1001.38 CN1001.39 CN1001.40 LED302.4 R326.2 R336.1 U302.3 | length 4.8
  L8 (Sig) w0.6: U302.3@22.825,91.665 25.1,91.665 R326.2@25.1,91.7 27.6,91.7 C311.2@27.6,91.725
DP3.3VS_PHY: C800.1 C801.1 C802.1 C813.1 C814.1 FB800.2 R834.1 R836.2 R837.2 R838.2 R839.2 U800.1 U800.27 | length 4
  L8 (Sig) w0.5: C813.1@9.675,55.25 C814.1@9.675,53.5 R834.1@11.875,53.5
DP5VS: C305.2 C306.2 C307.2 C310.2 C316.2 C317.2 C318.2 C319.2 C320.2 C321.2 U300.2 U300.7 U300.8 U300.21 U300.22 U300.32 U300.39 U300.42 U301.3 U302.2 | length 19
  L1 (Sig) w0.2: U300.32@41.8,55.3 41.8,54.575 42.575,53.8 C319.2@42.575,53.75 ; U300.39@44.175,56.875 44.875,56.875 45,56.75 45,56.117 45.633,56.117 C320.2@45.75,56
  L8 (Sig) w0.2: v1(40.8,60.95) 40.8,61.125 C316.2@41.075,61.4
  L8 (Sig) w0.6: C310.2@20.775,96.05 20.775,92.935 U302.2@22.825,92.935
  L8 (Sig) w0.8: C307.2@2.1,93.725 2.15,93.675 4.075,93.675 U301.3@4.15,93.6 4.15,94.3 4.175,94.3 ; C306.2@4.175,95.8 4.175,94.3 ; C305.2@7.425,95.8 7.425,94.3 4.175,94.3
  other v1: 42.25,53.4 42.85,54.1 46,55.75 45.5,56.25 37.475,57.1 38.85,57.1 45.45,58 46.05,58 40.8,61.775 43.85,62.7 44.35,63.3
eMMC_CLK: R718.1 R719.1 U703.M6
eMMC_CMD: R721.1 R732.1 U703.M5
eMMC_DAT0: R724.1 R733.1 U703.A3
eMMC_DAT1: R725.1 R734.1 U703.A4
eMMC_DAT2: R726.1 R735.1 U703.A5
eMMC_DAT3: R727.1 R736.1 U703.B2
eMMC_DAT4: R728.1 R737.1 U703.B3
eMMC_DAT5: R729.1 R738.1 U703.B4
eMMC_DAT6: R730.1 R739.1 U703.B5
eMMC_DAT7: R731.1 R740.1 U703.B6
eMMC_DS: R741.1 U703.H5
eMMC_nRST: R720.1 R723.1 U703.K5
eMMC_VDDIM: C709.2 U703.C2
ETH_nRESET: C807.2 R833.2 U800.19 U802.4 | length 4.9
  L8 (Sig) w0.4: R833.2@26.5,38.67 26.5,38.75 C807.2@28.825,38.75 28.825,40.55 U802.4@28.15,40.55
EXT_5V: CN300.1 R300.1
EXT_CLK_24MHZ: R540.2 U400.V10
EXT_CLK_32.768KHZ: R551.2 U400.A6
EXT_UART0_RX: CN1002.3 R900.1 R904.2
EXT_UART0_TX: CN1002.2 R903.2
GNDADC: C503.2 C504.2 C505.1 FB400.2 R545.2 U400.E8
GNDOSC0: C502.1 R400.1 U400.V11 X500.2
GNDOSC1: C506.1 R401.2 U400.A5 X501.2
GNDPWR: C313.1 C314.1 C315.1 CN300.2 CN300.3 R309.1
GPIO0_20: R916.1 U400.D14
GPIO1_16: R722.2 U400.R13
GPIO2_0: R722.1 U400.T13
GPIO3_20: R916.2 U400.D13
IN5VS: C300.2 C313.2 C314.2 C315.2 CN1001.1 CN1001.2 CN1001.3 CN1001.4 CN1001.5 CN1001.6 CN1001.7 CN1001.8 D300.1 LED300.4 R300.2 R302.2 R305.2 U300.10 | length 5.7
  L1 (Sig) w0.2: C313.2@39.25,66.5 C314.2@39.25,64.75 C315.2@39.25,63 39.452,62.798 39.798,62.798 39.798,61.809 ; U300.10@39.799,61.25 39.799,61.808
JTAG_EMU0: CN901.11 U400.C14
JTAG_EMU1: CN901.13 U400.B14
JTAG_nTRST: CN901.9 U400.B10
JTAG_TCK: CN901.1 U400.A12
JTAG_TDI: CN901.3 U400.B11
JTAG_TDO: CN901.5 U400.A11
JTAG_TMS: CN901.7 U400.C11
LDO_A_ADJ: C312.2 R326.1 R333.2 U302.4 | length 6
  L8 (Sig) w0.6: C312.2@22.025,88.55 22.825,88.55 ; R333.2@23.95,88.55 22.825,88.55 ; R326.1@25.1,90.4 25.1,90.395 U302.4@22.825,90.395 22.825,88.55
LDO_MIC_EN: R335.1 U302.1 | length 2.7
  L8 (Sig) w0.6: U302.1@22.825,94.205 22.825,94.6 R335.1@25.1,94.6
MICRO_SD_CLK: CN700.5 R704.1 R710.2
MICRO_SD_CMD: CN700.3 R705.1 R712.2
MICRO_SD_DAT0: CN700.7 R706.1 R713.2
MICRO_SD_DAT1: CN700.8 R707.1 R714.2
MICRO_SD_DAT2: CN700.1 R708.1 R715.2
MICRO_SD_DAT3: CN700.2 R709.1 R716.2
MII1_COL: R814.1 U400.H16
MII1_CRS_DV: R816.1 U400.H17
MII1_MDIO_CLK: R818.1 U400.M18
MII1_MDIO_DATA: R817.1 U400.M17
MII1_REFCLK: R813.1 R815.1 U400.H18
MII1_RXCLK: R806.1 U400.L18
MII1_RXD0: R807.1 U400.M16
MII1_RXD1: R808.1 U400.L15
MII1_RXD2: R809.1 U400.L16
MII1_RXD3: R810.1 U400.L17
MII1_RXDV: R811.1 U400.J17
MII1_RXER: R812.1 U400.J15
MII1_TXCLK: R800.1 U400.K18
MII1_TXD0: R802.1 U400.K17
MII1_TXD1: R803.1 U400.K16
MII1_TXD2: R804.1 U400.K15
MII1_TXD3: R805.1 U400.J18
MII1_TXEN: R801.1 U400.J16
MMC0_CD: R711.2 U400.C15
MMC0_CLK: R710.1 U400.G17
MMC0_CMD: R712.1 U400.G18
MMC0_DAT0: R713.1 U400.G16
MMC0_DAT1: R714.1 U400.G15
MMC0_DAT2: R715.1 U400.F18
MMC0_DAT3: R716.1 U400.F17
MMC1_CLK: R718.2 U400.U9
MMC1_CMD: R732.2 U400.V9
MMC1_DAT0: R733.2 U400.U7
MMC1_DAT1: R734.2 U400.V7
MMC1_DAT2: R735.2 U400.R8
MMC1_DAT3: R736.2 U400.T8
MMC1_DAT4: R737.2 U400.U8
MMC1_DAT5: R738.2 U400.V8
MMC1_DAT6: R739.2 U400.R9
MMC1_DAT7: R740.2 U400.T9
MMC1_nRST: R717.2 R723.2
MMC1_RST: U400.R14 U702.2
NetCN700_9: CN700.9 R703.1 R711.1
NetCN800_1: CN800.1 R840.2 | length 16.8
  L8 (Sig) w0.5: CN800.1@17.57,59.615 17.57,63.207 17.863,63.5 25.457,63.5 25.75,63.207 R840.2@25.75,58.375
NetCN800_2: CN800.2 R841.2 | length 16.8
  L8 (Sig) w0.5: CN800.2@20.11,58.345 19.9,58.555 19.9,60.35 19.36,60.89 19.36,61.64 19.653,61.933 20.067,61.933 20.25,61.75 20.523,61.75 20.773,61.75 21.066,62.043 21.066,62.114 21.201,62.249 21.831,62.249 21.966,62.114 21.966,60.152 22.101,60.017 22.731,60.017 22.866,60.152 22.866,61.457 23.158,61.75 23.5,61.75 23.793,62.043 24.207,62.043 24.5,61.75 24.5,60.25 23.75,59.5 23.75,58.625 R841.2@23.5,58.375
NetCN800_3: CN800.3 R842.2 | length 16
  L1 (Sig) w0.5: CN800.3@17.57,57.075 15.5,55.005 15.5,51.5 18.25,48.75 21,48.75 22.125,49.875 R842.2@23.5,49.875
NetCN800_6: CN800.6 R843.2 | length 16
  L1 (Sig) w0.5: CN800.6@20.11,53.265 20.125,53.25 22.5,53.25 24.05,53.25 24.343,52.957 24.343,51.69 24.538,51.495 25.448,51.495 25.643,51.69 25.643,52.957 25.936,53.25 27.507,53.25 27.707,53.25 28,52.957 28,50.293 27.582,49.875 R843.2@25.75,49.875
NetCN800_10: CN800.10 R845.2 | length 2.9
  L8 (Sig) w0.5: R845.2@3.4,59.25 CN800.10@6.32,59.25
NetCN800_11: CN800.11 R846.2 | length 2.9
  L8 (Sig) w0.5: R846.2@3.4,51.08 CN800.11@6.32,51.08
NetCN800_13: CN800.13 CN800.14 R844.1 | length 15.9
  L1 (Sig) w0.8: CN800.14@14.27,47.42 14.27,50.48 13.75,51 13.75,56.5 13.75,57.5 14.25,58 14.25,62.89 CN800.13@14.27,62.91
  other v1: 13.75,56 13.75,57
NetCN1000_1: CN1000.1 R1000.2
NetCN1000_2: CN1000.2 R1001.1
NetCN1000_5: CN1000.5 R1002.2
NetCN1000_6: CN1000.6 R1003.1
NetCN1000_9: CN1000.9 R1004.2
NetCN1000_10: CN1000.10 R1005.1
NetCN1000_13: CN1000.13 R1006.2
NetCN1000_14: CN1000.14 R1007.1
NetCN1000_17: CN1000.17 R1008.2
NetCN1000_18: CN1000.18 R1009.1
NetCN1000_21: CN1000.21 R1010.2
NetCN1000_22: CN1000.22 R1011.1
NetCN1000_25: CN1000.25 R1012.2
NetCN1000_26: CN1000.26 R1013.1
NetCN1000_29: CN1000.29 R1014.2
NetCN1000_30: CN1000.30 R1015.1
NetCN1000_33: CN1000.33 R1016.2
NetCN1000_34: CN1000.34 R1017.1
NetCN1000_37: CN1000.37 R1018.2
NetCN1000_38: CN1000.38 R1019.1
NetCN1000_41: CN1000.41 R1020.2
NetCN1000_42: CN1000.42 R1021.1
NetCN1000_45: CN1000.45 R1022.2
NetCN1000_49: CN1000.49 R1023.2
NetCN1000_53: CN1000.53 R1024.2
NetCN1000_57: CN1000.57 R1025.2
NetCN1000_61: CN1000.61 R1026.2
NetCN1000_65: CN1000.65 R1029.2
NetCN1000_69: CN1000.69 R1032.2
NetCN1000_73: CN1000.73 R1035.2
NetCN1000_77: CN1000.77 R1038.2
NetCN1000_81: CN1000.81 R1041.2
NetCN1000_85: CN1000.85 R1044.2
NetCN1000_89: CN1000.89 R1047.2
NetCN1000_93: CN1000.93 R1050.2
NetCN1000_97: CN1000.97 R1052.2
NetCN1001_45: CN1001.45 R1027.2
NetCN1001_46: CN1001.46 R1028.1
NetCN1001_49: CN1001.49 R1030.2
NetCN1001_50: CN1001.50 R1031.1
NetCN1001_53: CN1001.53 R1033.2
NetCN1001_54: CN1001.54 R1034.1
NetCN1001_57: CN1001.57 R1036.2
NetCN1001_58: CN1001.58 R1037.1
NetCN1001_61: CN1001.61 R1039.2
NetCN1001_62: CN1001.62 R1040.1
NetCN1001_65: CN1001.65 R1042.2
NetCN1001_66: CN1001.66 R1043.1
NetCN1001_69: CN1001.69 R1045.2
NetCN1001_70: CN1001.70 R1046.1
NetCN1001_73: CN1001.73 R1048.2
NetCN1001_74: CN1001.74 R1049.1
NetCN1001_78: CN1001.78 R1051.1
NetCN1001_82: CN1001.82 R1053.1
NetCN1001_86: CN1001.86 R1054.1
NetCN1001_90: CN1001.90 R1055.1
NetD300_2: D300.2 D301.2 R304.2
NetLED300_2: LED300.2 R306.1
NetLED301_2: LED301.2 R318.2 | length 1.4
  L1 (Sig) w0.4: v1(9.85,40.4) LED301.2@9.85,40.85
  L8 (Sig) w0.4: v1(9.85,40.4) 9.875,40.425 9.875,41.025 R318.2@10.1,41.25
NetLED302_2: LED302.2 R331.2 | length 1.5
  L1 (Sig) w0.4: v1(9.85,43.6) LED302.2@9.85,44.1
  L8 (Sig) w0.4: v1(9.85,43.6) 9.875,43.625 9.875,44.275 R331.2@10.1,44.5
NetLED303_4: LED303.4 R334.2
NetLED501_3: LED501.3 Q500.3
NetLED501_4: LED501.4 R541.1
NetLED502_3: LED502.3 Q501.3
NetLED502_4: LED502.4 R547.1
NetLED503_3: LED503.3 Q502.3
NetLED503_4: LED503.4 R550.1
NetLED504_3: LED504.3 Q503.3
NetLED504_4: LED504.4 R555.1
NetLED800_1: LED800.1 R853.1
NetLED800_2: LED800.2 R850.1
NetLED800_3: LED800.3 R847.1
NetQ500_1: Q500.1 R544.2 R546.2
NetQ501_1: Q501.1 R548.2 R549.2
NetQ502_1: Q502.1 R552.2 R554.2
NetQ503_1: Q503.1 R556.2 R557.2
NetQ800_1: Q800.1 R848.2 R849.2
NetQ801_1: Q801.1 R851.2 R852.2
NetQ802_1: Q802.1 R854.2 R855.2
NetR307_1: R307.1 R308.2 U300.4 U300.5 | length 4.6
  L1 (Sig) w0.2: R307.1@41.25,64.75 41.3,64.75 41.69,64.36 R308.2@41.69,63.25 41.8,63.14 41.8,61.675 ; U300.5@41.8,61.25 41.8,61.675 ; U300.4@42.199,61.25 42.199,61.675 41.8,61.675
NetR308_1: R308.1 U300.6 | length 2.2
  L1 (Sig) w0.2: R308.1@40.81,63.25 41,63.06 41,62.75 41.399,62.351 U300.6@41.399,61.25
NetR518_2: R518.2 SW500.1
NetR519_2: R519.2 R520.2 U400.C9
NetR522_2: R522.2 U400.P17
NetR540_1: R540.1 X500.3
NetR543_2: R543.2 X500.1
NetR551_1: R551.1 X501.3
NetR553_2: R553.2 X501.1
NetR717_1: R717.1 U702.4
NetR822_1: R822.1 R823.2
NetR900_2: R900.2 U900.2
NetR901_1: R901.1 U900.6
NetR902_2: R902.2 U900.5
NetR903_1: R903.1 U900.3
PHY_CRS: R816.2 U800.14
PHY_MDC: R818.2 U800.17
PHY_MDIO: R817.2 R825.1 U800.16
PHY_MODE2: R814.2 R826.1 U800.15
PHY_RBIAS: R822.2 U800.32
PHY_RX_N: C812.2 R839.1 R843.1 U800.30
PHY_RX_P: C811.2 R838.1 R842.1 U800.31
PHY_RXCLK: R806.2 R813.2 R829.2 U800.7
PHY_RXD0/MODE0: R807.2 R828.1 U800.11
PHY_RXD1/MODE1: R808.2 R827.1 U800.10
PHY_RXD2/RMIISEL: R809.2 R830.2 U800.9
PHY_RXD3/PHYAD2: R810.2 R831.2 U800.8
PHY_RXDV: R811.2 U800.26
PHY_RXER/PHYAD0: R812.2 R832.2 U800.13
PHY_TX_N: C810.2 R837.1 R841.1 U800.28
PHY_TX_P: C809.2 R836.1 R840.1 U800.29
PHY_TXCLK: R800.2 U800.20
PHY_TXD0: R802.2 U800.22
PHY_TXD1: R803.2 U800.23
PHY_TXD2: R804.2 U800.24
PHY_TXD3: R805.2 U800.25
PHY_TXD4: R824.2 U800.18
PHY_TXEN: R801.2 U800.21
PHY_VDDCR: C803.1 C804.1 U800.6
PHY_XTAL1: R815.2 R820.2 U800.5
PHY_XTAL2: R821.2 U800.4
PMIC_BYPASS: C304.2 U300.47 | length 2.4
  L1 (Sig) w0.2: U300.47@44.175,60.075 44.925,60.075 v1(44.95,60.1)
  L8 (Sig) w0.2: C304.2@44,59.425 44.95,59.425 v1(44.95,60.1)
PMIC_I2C_SCL: R320.1 R322.1 U300.28 | length 9.1
  L1 (Sig) w0.2: R320.1@36.125,49.25 37,49.25 37.45,49.7 37.45,53.2 37.65,53.4 39.15,53.4 40.2,54.45 U300.28@40.2,55.3
PMIC_I2C_SDA: R321.1 R323.1 U300.27 | length 6.4
  L1 (Sig) w0.2: R321.1@36.125,51.5 36.125,51.591 36.6,52.066 36.833,52.066 36.95,52.184 36.95,53.4 37.35,53.8 38.95,53.8 39.8,54.65 U300.27@39.8,55.3
PMIC_INT_LDO: C303.2 U300.48 | length 1.8
  L1 (Sig) w0.2: U300.48@44.175,60.475 44.63,60.475 44.755,60.6 v1(45.25,60.6)
  L8 (Sig) w0.2: v1(45.25,60.6) 45.25,61.075 C303.2@45.425,61.25
PMIC_L1: L300.1 U300.20 | length 3.9
  L1 (Sig) w0.2: L300.1@34.5,58.16 34.985,57.675 U300.20@38.225,57.675
PMIC_L2: L301.1 U300.23 | length 4.5
  L1 (Sig) w0.2: L301.1@34.5,55.75 34.5,56.475 U300.23@38.225,56.475
PMIC_L3: L302.1 U300.31 | length 4.2
  L1 (Sig) w0.2: L302.1@40.75,51.75 41.4,51.75 U300.31@41.4,55.3
PMIC_LDO1_VOUT: R313.1 R314.1 R315.1 U300.3
  other v1: 45.55,64.1 45.55,65
PMIC_LDO2_VOUT: R316.1 U300.1 | length 3
  L1 (Sig) w0.2: U300.1@43.4,61.25 45.5,61.25 45.5,62 R316.1@45.625,62
PMIC_LDO3_VOUT: R317.1 U300.40 | length 4.2
  L1 (Sig) w0.2: U300.40@44.175,57.275 46.35,57.275 47.175,56.45 47.175,56.35 47.65,55.875 R317.1@47.75,55.875
PMIC_LDO4_VOUT: R319.1 U300.43 | length 3.2
  L1 (Sig) w0.2: U300.43@44.175,58.475 47.35,58.475 R319.1@47.375,58.5
PMIC_LDO_PGOOD: R329.1 U300.46 | length 3.8
  L1 (Sig) w0.2: U300.46@44.175,59.675 45.125,59.675 46.2,60.75 v1(47.5,60.75)
PMIC_nINT: R328.1 R330.1 U300.45 | length 3.2
  L1 (Sig) w0.2: U300.45@44.175,59.275 45.325,59.275 46.302,60.252 v1(46.998,60.252) v1@47,60.25
PMIC_nRESET: C302.2 R304.1 SW301.1 U300.44 | length 2.7
  L1 (Sig) w0.2: U300.44@44.175,58.875 45.525,58.875 v1(46.5,59.85)
PMIC_nWAKEUP: R327.1 R332.1 U300.13
PMIC_PB_IN: C301.2 R302.1 R303.1 SW300.1 U300.25 | length 6.9
  L1 (Sig) w0.2: v1(38.525,55.275) 38.975,55.275 U300.25@39,55.3
  L1 (Sig) w0.4: v1(11.5,33.6) 11.5,32.8 SW300.1@11.55,32.75
  L8 (Sig) w0.4: R302.1@9.15,32.75 9.15,34.325 ; R303.1@9.15,35.25 9.15,34.325 ; v1(11.5,33.6) C301.2@11.5,34.325 9.15,34.325
PMIC_PRIMARY_PGOOD: R325.1 U300.26 | length 0.8
  L1 (Sig) w0.2: U300.26@39.4,55.3 v1@39.4,56.1
  other v1: 39.4,56.1
PMIC_PWR_EN: R324.1 U300.9 | length 1.4
  L1 (Sig) w0.2: U300.9@40.199,61.25 40.199,62.199 v1(40.5,62.5)
PMIC_VDCDC1: L300.2 R310.1 U300.19 | length 9.4
  L1 (Sig) w0.2: U300.19@38.225,58.075 v1(38.95,58.075)
  L8 (Sig) w0.2: v1(32,60) 35.883,60 36,59.883 36,58.25 36.175,58.075 v1(38.95,58.075)
PMIC_VDCDC2: L301.2 R311.1 U300.24 | length 7.5
  L1 (Sig) w0.2: v1(37.95,55.7) 37.95,56.075 U300.24@38.225,56.075
  L8 (Sig) w0.2: v1(32,53.57) 35.82,53.57 v1(37.95,55.7)
PMIC_VDCDC3: L302.2 R312.1 U300.29 | length 9.5
  L1 (Sig) w0.2: U300.29@40.6,55.3 v1(40.6,56.1)
  L8 (Sig) w0.2: v1(38.57,49.25) 38.57,50.57 38.75,50.75 40.483,50.75 40.6,50.867 v1(40.6,56.1)
RJ45_LED_GR_A: CN800.9 U800.3
RJ45_LED_YEL_A: CN800.12 R819.2 U800.2
RJ45_TCT: CN800.4 CN800.5 R834.2 | length 7.5
  L8 (Sig) w0.5: R834.2@13.642,53.517 R834.2@13.625,53.5 16.413,53.5 17.448,54.535 CN800.5@17.57,54.535 17.643,54.535 18.703,55.595 19.9,55.595 CN800.4@20.11,55.805
RTC_KALDO_nEN: R539.1 U400.B4
STATUS_LED_B: Q802.3 R847.2
STATUS_LED_G: Q801.3 R850.2
STATUS_LED_R: Q800.3 R853.2
SYS_BOOT0: R517.1 R538.2 R1000.1 U400.R1
SYS_BOOT1: R516.1 R537.2 R1002.1 U400.R2
SYS_BOOT2: R515.1 R518.1 R536.2 R1004.1 U400.R3
SYS_BOOT3: R514.1 R535.2 R1006.1 U400.R4
SYS_BOOT4: R513.1 R534.2 R1008.1 U400.T1
SYS_BOOT5: R512.1 R533.2 R1010.1 U400.T2
SYS_BOOT6: R511.1 R532.2 R1012.1 U400.T3
SYS_BOOT7: R510.1 R531.2 R1014.1 U400.T4
SYS_BOOT8: R509.1 R530.2 R1016.1 U400.U1
SYS_BOOT9: R508.1 R529.2 R1018.1 U400.U2
SYS_BOOT10: R507.1 R528.2 R1020.1 U400.U3
SYS_BOOT11: R506.1 R527.2 R1022.1 U400.U4
SYS_BOOT12: R505.1 R526.2 R1023.1 U400.V2
SYS_BOOT13: R504.1 R525.2 R1024.1 U400.V3
SYS_BOOT14: R503.1 R524.2 R1025.1 U400.V4
SYS_BOOT15: R502.1 R523.2 R1026.1 U400.T5
SYS_nRESET: CN901.4 R909.1 R911.1 SW900.1
TIMER4: R1015.2 U400.R7
TIMER5: R1017.2 U400.T6
TIMER6: R1019.2 U400.U6
TIMER7: R1021.2 U400.T7
USB0_D_N: CN500.2 U400.N18 U501.2
USB0_D_P: CN500.3 U400.N17 U501.1
USB0_ID: CN500.4 U400.P16 U501.3
USB0_SH: C500.1 CN500.S1 CN500.S2 R501.2
USB0_VBUS: C501.2 CN500.1 LED500.4 R500.2 U400.P15 U501.6
USB0_VBUS_LED: LED500.2 R521.1
USB9_CC1: CN900.A5 R906.2
USB9_CC2: CN900.B5 R905.2
USB9_D_N: CN900.A7 CN900.B7 U903.5
USB9_D_P: CN900.A6 CN900.B6 U903.4
USB9_SH: C901.2 CN900.S1 CN900.S2 CN900.S3 CN900.S4 R907.1
USB9_VBUS: C902.2 C903.1 CN900.A4 CN900.B4 LED900.4 U903.8
USB9_VBUS_LED: LED900.2 R908.1
USB_5VS: C322.2 D301.1 R301.2 R303.2 R500.1 U300.12
VDD_ADC: C409.2 FB402.2 R542.2 U400.D8
VDD_MPU_MON: TP400.1 U400.A2
VDD_PLL: C405.2 C406.2 C407.2 C410.2 C502.2 FB401.2 R543.1 U400.E7 U400.H15 U400.R10 U400.R11 X500.4
VPP: R402.1 U400.M5
VREFN: R545.1 U400.A9
VREFP: C503.1 C504.1 C505.2 R542.1 U400.B9
XTAL1: C805.2 R820.1 X800.1
XTAL2: C806.2 R821.1 X800.3
ZQ: R604.2 U601.L8
pads on no net: CN300.0 CN700.MH CN800. CN800.7 CN900.0 CN900.A8 CN900.B8 CN901. CN1000. CN1000.46 CN1000.50 CN1000.54 CN1000.58 CN1000.62 CN1000.66 CN1000.70 CN1000.74 CN1000.78 CN1000.82 CN1000.86 CN1000.90 CN1000.94 CN1000.98 CN1001. CN1001.9 CN1001.10 CN1001.11 CN1001.12 CN1001.21 CN1001.22 CN1001.23 CN1001.24 CN1001.31 CN1001.32 CN1001.33 CN1001.34 CN1001.41 CN1001.42 CN1001.43 CN1001.44 CN1001.77 CN1001.81 CN1001.85 CN1001.89 CN1001.93 CN1001.94 CN1001.97 CN1001.98 H1000.1 H1001.1 H1002.1 H1003.1 LED300.1 LED300.3 LED301.1 LED301.3 LED302.1 LED302.3 LED303.1 LED303.3 LED500.1 LED500.3 LED501.1 LED501.2 LED502.1 LED502.2 LED503.1 LED503.2 LED504.1 LED504.2 LED900.1 LED900.3 LED901.1 LED901.2 LED902.1 LED902.2 R402.2 R741.2 SW300.2 SW300.4 SW301.2 SW301.4 SW500.2 SW500.4 SW900.2 SW900.4 U300.11 U300.14 U300.15 U300.16 U300.17 U300.33 U300.34 U300.35 U300.36 U300.37 U300.38 U400.A3 U400.A4 U400.A14 U400.A15 U400.B12 U400.C13 U400.C18 U400.E17 U400.F15 U400.F16 U400.M15 U400.P18 U400.R6 U400.R17 U400.R18 U400.T14 U400.T18 U400.U11 U400.U14 U400.U16 U400.U18 U400.V6 U400.V12 U400.V14 U400.V17 U501.5 U601.J1 U601.J9 U601.L1 U601.L9 U701.1 U701.2 U701.3 U702.1 U703.A1 U703.A2 U703.A7 U703.A8 U703.A9 U703.A10 U703.A11 U703.A12 U703.A13 U703.A14 U703.B1 U703.B7 U703.B8 U703.B9 U703.B10 U703.B11 U703.B12 U703.B13 U703.B14 U703.C1 U703.C3 U703.C5 U703.C7 U703.C8 U703.C9 U703.C10 U703.C11 U703.C12 U703.C13 U703.C14 U703.D1 U703.D2 U703.D3 U703.D4 U703.D12 U703.D13 U703.D14 U703.E1 U703.E2 U703.E3 U703.E5 U703.E8 U703.E9 U703.E10 U703.E12 U703.E13 U703.E14 U703.F1 U703.F2 U703.F3 U703.F10 U703.F12 U703.F13 U703.F14 U703.G1 U703.G2 U703.G3 U703.G10 U703.G12 U703.G13 U703.G14 U703.H1 U703.H2 U703.H3 U703.H12 U703.H13 U703.H14 U703.J1 U703.J2 U703.J3 U703.J12 U703.J13 U703.J14 U703.K1 U703.K2 U703.K3 U703.K6 U703.K7 U703.K10 U703.K12 U703.K13 U703.K14 U703.L1 U703.L2 U703.L3 U703.L12 U703.L13 U703.L14 U703.M1 U703.M2 U703.M3 U703.M7 U703.M8 U703.M9 U703.M10 U703.M11 U703.M12 U703.M13 U703.M14 U703.N1 U703.N3 U703.N6 U703.N7 U703.N8 U703.N9 U703.N10 U703.N11 U703.N12 U703.N13 U703.N14 U703.P1 U703.P2 U703.P7 U703.P8 U703.P9 U703.P10 U703.P11 U703.P12 U703.P13 U703.P14 U902.1 U903.1 U903.2 U903.10 U903.11 U903.12 U903.13 U903.14 U903.15 U903.16 U903.17 U903.18 U903.19 U903.20 U903.21 U903.22 U903.23 U903.24 U903.27 U903.28

## Polygon pours and split planes (outlines as drawn)
PMIC_L1 on L1 (Sig) "PMIC_L1_L01_P000" (solid, pour order 0): 38.225,57.575 37.5,57.575 33.425,57.575 33.425,58.8 36.6,58.8 37.625,57.775 38.225,57.775
PMIC_L2 on L1 (Sig) "PMIC_L2_L01_P001" (solid, pour order 1): 38.225,56.375 37.475,56.375 36.225,55.125 33.4,55.125 33.4,56.575 38.225,56.575
PMIC_VDCDC1 on L1 (Sig) "PMIC_VDCDC1_L01_P002" (solid, pour order 2): 35.65,61 35.65,59.5 31.25,59.5 31.25,61
PMIC_VDCDC2 on L1 (Sig) "PMIC_VDCDC2_L01_P003" (solid, pour order 3): 35.65,54.2 35.65,52.9 31.25,52.9 31.25,54.2
PMIC_L3 on L1 (Sig) "PMIC_L3_L01_P004" (solid, pour order 4): 41.5,55.3 41.5,50.625 40.125,50.625 40.125,53.625 41.3,54.8 41.3,55.3
PMIC_VDCDC3 on L1 (Sig) "PMIC_VDCDC3_L01_P005" (solid, pour order 5): 37.95,48.5 39.25,48.5 39.25,52.9 37.95,52.9
DP5VS on L1 (Sig) "DP5VS_L01_P006" (solid, pour order 6): 37.8,57.375 37.25,57.375 37.25,56.775 39.075,56.775 39.075,57.375
PMIC_LDO3_VOUT on L1 (Sig) "PMIC_LDO3_VOUT_L01_P007" (solid, pour order 7): 48.45,57.075 48.15,57.375 44.175,57.375 44.175,57.175 45.125,57.175 45.6,56.7 46.525,56.7 46.8,56.425 46.775,56.4 46.775,55.3 48.45,55.3
DP5VS on L1 (Sig) "DP5VS_L01_P008" (solid, pour order 8): 44.225,57.975 44.925,57.975 45.175,57.725 46.275,57.725 46.275,58.175 46.25,58.175 44.225,58.175
PMIC_LDO4_VOUT on L1 (Sig) "PMIC_LDO4_VOUT_L01_P010" (solid, pour order 10): 44.225,58.375 46.425,58.375 46.6,58.2 46.6,57.8 48,57.8 48,59.2 46.35,59.2 45.725,58.575 44.225,58.575
PMIC_LDO2_VOUT on L1 (Sig) "PMIC_LDO2_VOUT_L01_P011" (solid, pour order 11): 43.3,60.825 43.3,61.675 43.85,61.675 44.85,62.675 46.2,62.675 46.2,61.125 43.825,61.125 43.525,60.825
DP5VS on L1 (Sig) "DP5VS_L01_P012" (solid, pour order 12): 44.125,63.5 44.525,63.5 44.525,62.5 44.375,62.5 43.85,61.975 43.3,61.975 43.1,61.775 43.1,61.298 42.9,61.298 42.9,61.3 42.9,62.275
PMIC_LDO1_VOUT on L1 (Sig) "PMIC_LDO1_VOUT_L01_P013" (solid, pour order 13): 46.2,67.4 44.724,67.4 44.726,65.82 42.225,63.319 42.225,62.1 42.5,61.825 42.5,61.298 42.7,61.298 42.7,62.35 42.7,62.45 44.025,63.775 46.2,63.775
DP5VS on L1 (Sig) "DP5VS_L01_P014" (solid, pour order 14): 40.5,60.775 41.1,60.775 41.1,61.825 40.9,62.025 40.65,62.025 40.5,61.875
IN5VS on L1 (Sig) "IN5VS_L01_P015" (solid, pour order 15): 39.9,61.298 39.9,67.05 38.8,67.05 38.8,62.5 38.95,62.5 39.7,61.75 39.7,61.298
USB_5VS on L1 (Sig) "USB_5VS_L01_P016" (solid, pour order 16): 39.1,60.825 37.375,60.825 36.725,61.475 35.525,61.475 35.525,62.55 37,62.55 37.875,61.675 39.1,61.675
DP5VS on L8 (Sig) "DP5VS_L08_P009" (solid, pour order 9): 45.225,58.175 45.225,57 46.25,57 46.25,58.175
PMIC_LDO1_VOUT on L8 (Sig) "PMIC_LDO1_VOUT_L08_P017" (solid, pour order 17): 44.95,65.675 46.2,65.675 46.2,63.775 44.95,63.775

## Keep-outs
Keep-Out Layer:
  lines w0.1: 0,2.5 ccw(c2.5,2.5) 2.5,0 117.5,0 ccw(c117.5,2.5) 120,2.5 120,82.5 ccw(c117.5,82.5) 117.5,85 2.5,85 ccw(c2.5,82.5) 0,82.5 0,2.5 ; 100,2.5 100,2.5

## Silkscreen, mask and mechanical layers (free items; w line width, h text height)
Top Overlay:
  text "DC 5V" at 13.5,81.5 h1.52
  text "PMIC" at 13.5,78.5 h1.52
  text "PMIC RST" at 21.25,76 h1.52
  text "STATUS" at 129.633,47.75 h1.52
  text "LED1" at 129.625,45.5 h1.52
  text "3.3VS_MIC" at 0.65,43.67 h1.52
  text "LED2" at 129.625,43.25 h1.52
  text "LED3" at 129.625,41 h1.52
  text "3.3VS_AMS" at 0.65,40.42 h1.52
  text "LED4" at 129.625,38.75 h1.52
  text "PWR ON" at 4,30 h1.52
  text "SOC RST" at 3.5,21.25 h1.52
  text "uSD BOOT" at 3,12 h1.52
Bottom Overlay:
  lines w0.2: 14,37.25 22.673,37.25 22.673,44.173 14,44.173 14,37.25
  text "LDO SEL" at 22.77,44.1 h1.52